# Altium PCB PCB2.PcbDoc
Units mil, origin at the board's own origin, x right, y up, seen from the top; angles counter-clockwise.
Board outline 1400 x 1550 mil, 2 copper layers (Top Layer, Bottom Layer); 17 components, 18 nets, 75 pads, 0 vias.
Unrouted connection lines stored in the file: 1.
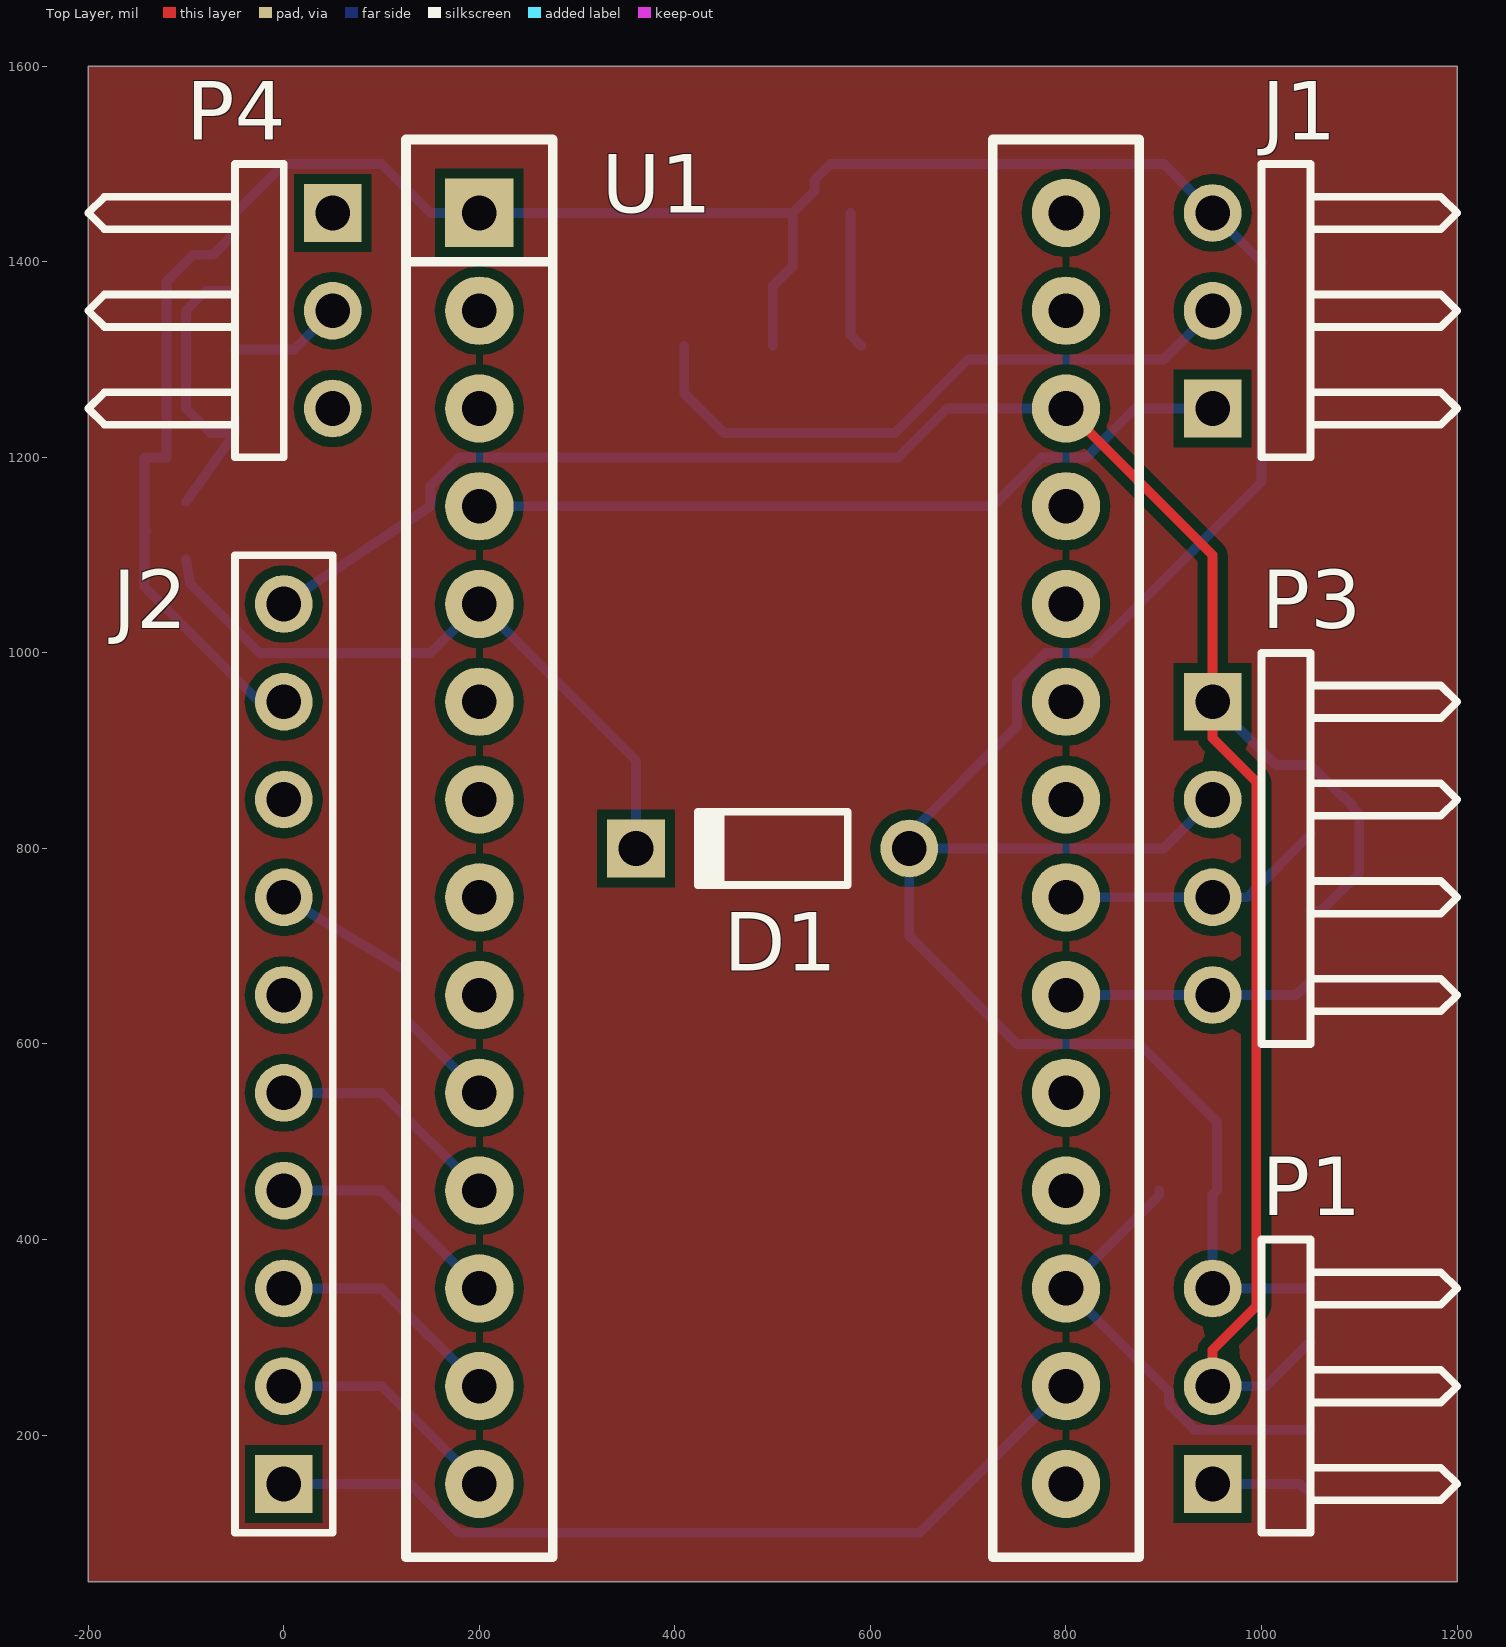
[diagram p0: Top Layer view]
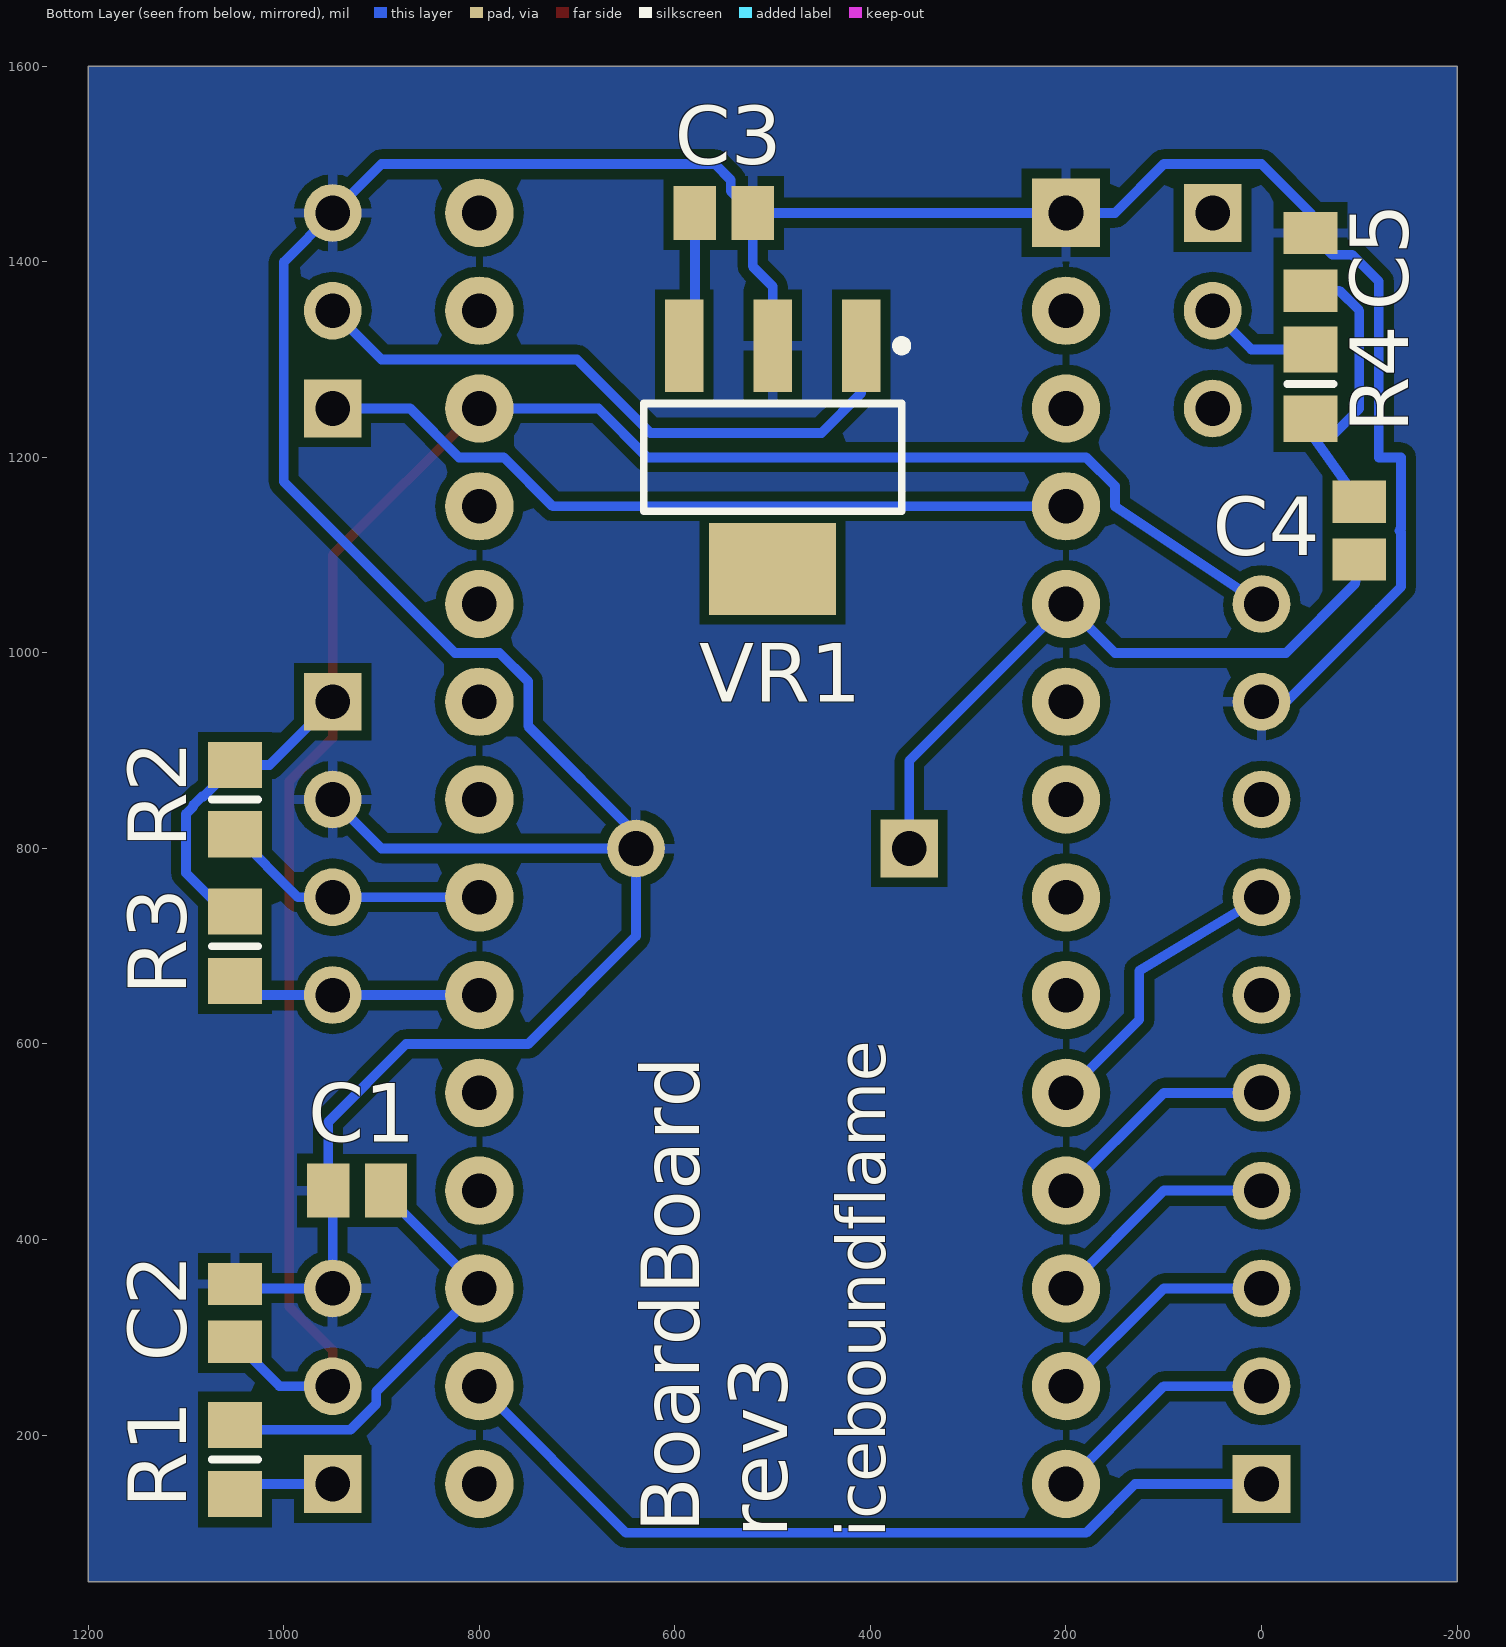
[diagram p1: Bottom Layer view, seen from below]

## Layer stack, top to bottom
Top Solder: solder mask 0.4, Solder Resist, Dk 3.5
Top Layer: signal copper 1.4
Dielectric 1: dielectric 12.6, FR-4, Dk 4.8
Bottom Layer: signal copper 1.4
Bottom Solder: solder mask 0.4, Solder Resist, Dk 3.5

## Board outline
1200,1600 -200,1600 -200,50 1200,50

## Design rules (kind name [scope] priority, off if disabled: settings)
Clearance [All] p1: gap=10
ComponentClearance [All] p1 off: gap=10 collisioncheckmode=3 verticalgap=10 showdistances=FALSE
PolygonConnect [All] p1: connectstyle=Relief reliefconductorwidth=10 reliefentries=4 polygonreliefangle="90 Angle" airgapwidth=10
RoutingVias [All] p1: holewidth=28 width=50 viastyle="Through Hole" minholewidth=28 minwidth=50 maxholewidth=28 maxwidth=50
SolderMaskExpansion [All] p1: expansion=4
UnpouredPolygon [All] p1: allowunpoured=FALSE
Width Width_Pwr [InNetClass('Power')] p1: maxlimit=30 minlimit=8 preferedwidth=10 minimp=50.000000 maximp=50.000000 favimp=50.000000
Width [All] p2: maxlimit=25 minlimit=6 preferedwidth=10 minimp=50.000000 maximp=50.000000 favimp=50.000000
28 further rules are at their usual default settings.

## Classes and differential pairs
net class Power: +3V3 +5V GND

## Components (designator, comment, footprint, x,y, rotation, side; value= is the part's Value field where it differs from the comment)
C1 "Cap Pol3" C0805 1050,325 r90 bottom
C2 "Cap" C0805 925,450 r180 bottom
C3 "Cap Pol3" C0805 550,1450 r180 bottom
C4 "Cap" C0805 -100,1125 r270 bottom
C5 "Cap" C0805 -50,1400 r270 bottom
D1 "3V3" DO-35 500,800 r180 top
J1 "ESC_AND_BEC" HDR1X3H 950,1250 r90 top
J2 "ADAFRUIT_NRF8001" HDR1X10 0,150 r90 top
P1 "Header 3" HDR1X3H 950,150 r90 top
P3 "Header 4" HDR1x4H 950,950 r270 top
P4 "Header 3" HDR1X3H 50,1450 r270 top
R1 "Res3" 6-0805_N 1050,175 r270 bottom
R2 "Res3" 6-0805_N 1050,850 r90 bottom
R3 "Res3" 6-0805_N 1050,700 r90 bottom
R4 "Res3" 6-0805_N -50,1275 r270 bottom
U1 "TeensyBasic" TeensyBasic 200,1450 r0 top
VR1 "Volt Reg" SOT223_N 500,1200 r270 bottom

## Footprints (in the part's own frame and the unit in brackets; to place one, negate y for a bottom-side part, rotate by r counter-clockwise, add the part's x,y. Pads: shape width x height; smd on the part's side, far side on the other; paste and mask are expansions set on the pad)
6-0805_N [mm] "Chip Resistor, Body 2.0x1.2mm, IPC Medium Density"
  rect 1.2x1.4 smd: 1(-0.9,0) 2(0.9,0)
  silkscreen extent 0,-0.6 0,0.6, body extent -1.07,-0.7 1.07,0.7, height 0.7
C0805 [mm] "Chip Capacitor, Body 2.0x1.3mm, IPC High Density"
  rect 1.1x1.4 smd: 1(-0.75,0) 2(0.75,0)
  body extent -1.1,-0.72 1.1,0.72, height 1.4
DO-35 [mm] "Diode, Axial; Body 3.8 x 1.9 mm (LxDia. max), Lead Dia. 0.53 mm (max)"
  round 1.5 hole 0.9: 1(-3.55,0)
  rect 1.5x1.5 hole 0.9: 2(3.55,0)
  silkscreen extent -1.95,-0.95 2.05,0.95
HDR1X3H [mm] "Connector; Header; 3 Position; Right Angle"
  rect 1.5x1.5 hole 0.9: 1(0,0)
  round 1.5 hole 0.9: 2(2.54,0) 3(5.08,0)
  silkscreen extent -1.27,-6.35 6.35,-1.27
HDR1x4H [mm] "Connector; Header; 4 Position; Right Angle"
  rect 1.5x1.5 hole 0.9: 1(0,0)
  round 1.5 hole 0.9: 2(2.54,0) 3(5.08,0) 4(7.62,0)
  silkscreen extent -1.27,1.27 8.89,6.35
HDR1X10 [mm] "Connector; Header; 10 Position"
  rect 1.5x1.5 hole 0.9: 1(0,0)
  round 1.5 hole 0.9: 2(2.54,0) 3(5.08,0) 4(7.62,0) 5(10.16,0) 6(12.7,0) 7(15.24,0) 8(17.78,0) 9(20.32,0) 10(22.86,0)
  silkscreen extent -1.27,-1.27 24.13,1.27
SOT223_N [mm] "SOT223, 4-Leads, Body 6.5x3.5mm, Pitch 2.3mm, Lead Span 7mm, IPC Medium Density"
  rect 2.4x1 smd: 1(-2.9,2.3) 2(-2.9,0) 3(-2.9,-2.3)
  rect 2.4x3.3 smd: 4(2.9,0)
  silkscreen extent -3.02,-3.35 1.4,3.47, body extent -1.85,-3.35 1.85,3.35, height 1.7
TeensyBasic [mil]
  rect 70x70 hole 35.43: 1(0,0)
  round 70 hole 35.43: 2(0,-100) 3(0,-200) 4(0,-300) 5(0,-400) 6(0,-500) 7(0,-600) 8(0,-700) 9(0,-800) 10(0,-900) 11(0,-1000) 12(0,-1100) 13(0,-1200) 14(0,-1300) 15(600,-1300) 16(600,-1200) 17(600,-1100) 18(600,-1000) 19(600,-900) 20(600,-800) 21(600,-700) 22(600,-600) 23(600,-500) 24(600,-400) 25(600,-300) 26(600,-200) 27(600,-100) 28(600,0)
  silkscreen extent -75,-1375 675,75

## Part data
C1 C3: "Polarized Capacitor (Surface Mount)"
C2 C4 C5: "Capacitor"
D1: library part "D Zener", "Zener Diode"
P1 P4: "Header, 3-Pin"
P3: "Header, 4-Pin"
R1 R2 R3 R4: "Resistor"
VR1: "Voltage Regulator"

## Nets (pads, with @x,y where several pads share a name; then routed paths per layer and width w, separated by ;. In a path a pad name is that pad's centre, name@x,y a point inside that pad or via, vN(x,y) a via of type N, cw(c..) or ccw(c..) an arc to the next point about the centre after c; other vN are vias at no path point)
+3V3: C1.1 J2.10 P1.2 P3.1 R2.2 R3.2 U1.26 | length 2426.9
  Top Layer w10: U1.26 950,1100 P3.1 950,912.97 994.53,868.44 994.53,331.56 950,287.03 P1.2
  Bottom Layer w10: J2.10 150,1150 150,1170.71 179.29,1200 628.28,1200 678.28,1250 U1.26 ; P1.2 1004.53,250 C1.1 ; P3.1 1014.57,885.43 R2.2 1082.24,853.19 1083.77,853.19 1092.56,844.4 1092.56,842.87 1100,835.43 1100,775 1060.43,735.43 R3.2
+5V: C3.1 U1.28 VR1.3 | length 140.4
  Bottom Layer w10: C3.1 579.53,1325.2 VR1.3
BLE_READY: J2.5 U1.11 | length 241.4
  Bottom Layer w10: J2.5 100,550 U1.11
BLE_RESET: J2.7 U1.10 | length 301.8
  Bottom Layer w10: J2.7 125,675 125,625 U1.10
CS: J2.4 U1.12 | length 241.4
  Bottom Layer w10: J2.4 100,450 U1.12
CURSENSE: C2.2 R1.1 U1.17 | length 462
  Bottom Layer w10: C2.2 895.47,445.47 U1.17 905.47,244.53 905.47,231.56 931.56,205.47 1050,205.47 R1.1
GND: C1.2 C2.1 C3.2 C5.1 D1.1 J1.3 J2.9 P1.3 P3.2 U1.1 VR1.2 | length 3807.5
  Bottom Layer w10: -120,1045 -25,950 J2.9 ; -119.95,1045 -142.56,1067.61 -142.56,1123.34 -140.9,1125 -142.56,1126.66 -142.56,1200 -120,1200 -120,1380 -92.87,1407.13 -72.4,1407.13 C5.1 -50,1450 0,1500 100,1500 150,1450 U1.1 C3.2 ; VR1.2 500,1375 520.47,1395.47 C3.2 ; P3.2 900,800 D1.1 ; C1.2 1045.47,350 P1.3 950,445.47 C2.1 954.53,520.47 875,600 750,600 639.76,710.24 D1.1 ; C3.2 542.87,1472.4 542.87,1483.77 559.1,1500 900,1500 J1.3 1000,1400 1000,1175 825,1000 779.29,1000 750,970.71 750,925 639.76,814.76 D1.1
MISO: J2.2 U1.14 | length 241.4
  Bottom Layer w10: J2.2 100,250 U1.14
MOSI: J2.3 U1.13 | length 241.4
  Bottom Layer w10: J2.3 100,350 U1.13
NetC4_1: C4.1 C5.2 R4.2 | length 319.8
  Bottom Layer w10: C4.1 R4.2@-50,1225 ; R4.2 R4.2@-50,1225 ; C5.2 -79.53,1370.47 -100,1350 -100,1250 -75,1225 R4.2@-50,1225
NetC4_2: C4.2 D1.2 U1.5 | length 687.2
  Bottom Layer w10: C4.2 -95.84,1070.84 -25,1000 150,1000 U1.5 360.24,889.76 D1.2
NetJ1_2: J1.2 VR1.1 | length 657.7
  Bottom Layer w10: VR1.1 409.45,1265.55 450,1225 625,1225 700,1300 900,1300 J1.2
NetP1_1: P1.1 R1.2 | length 104.3
  Bottom Layer w10: P1.1 1039.57,150 R1.2
NetP3_3: P3.3 R2.1 U1.21 | length 276.7
  Bottom Layer w10: U1.21 P3.3 985.43,750 R2.1
NetP3_4: P3.4 R3.1 U1.20 | length 256
  Bottom Layer w10: U1.20 P3.4 1035.43,650 R3.1
NetP4_2: P4.2 R4.1 | length 116.4
  Bottom Layer w10: R4.1 10.43,1310.43 P4.2
PWM_OUT: J1.1 U1.4 | length 791.4
  Bottom Layer w10: U1.4 725,1150 775,1200 820.71,1200 870.71,1250 J1.1
SCK: J2.1 U1.16 | length 882.8
  Bottom Layer w10: J2.1 129.29,150 179.29,100 650,100 U1.16
pads on no net: J2.6 J2.8 P4.1 P4.3 U1.2 U1.3 U1.6 U1.7 U1.8 U1.9 U1.15 U1.18 U1.19 U1.22 U1.23 U1.24 U1.25 U1.27 VR1.4

## Polygon pours and split planes (outlines as drawn)
GND on Bottom Layer "Bot Layer GND" (solid, pour order 4): -200,1600 -200,50 1200,50 1200,1600
no net on Top Layer "Top Layer GND" (solid, pour order 3): -200,1600 -200,50 1200,50 1200,1600

## Silkscreen, mask and mechanical layers (free items; w line width, h text height)
Bottom Overlay:
  text "BoardBoard" at 575,100 h60 r270
  text "iceboundflame" at 385,95 h50 r270
  text "rev3" at 485,95 h60 r270
Mechanical 1:
  lines w10: -200,50 -200,1600 1200,1600 1200,50 -200,50 ; -200,50 -200,50